# EAGLE board MINI_SAM_D51_006 (EAGLE 9.1.1)
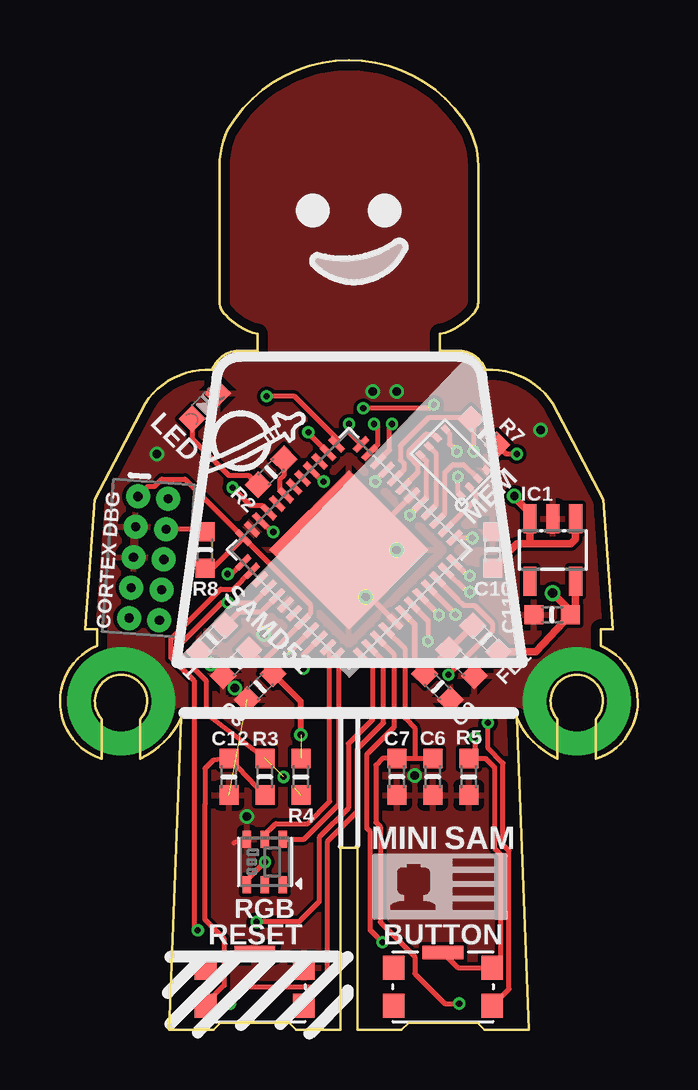
[diagram p0: board, top side]
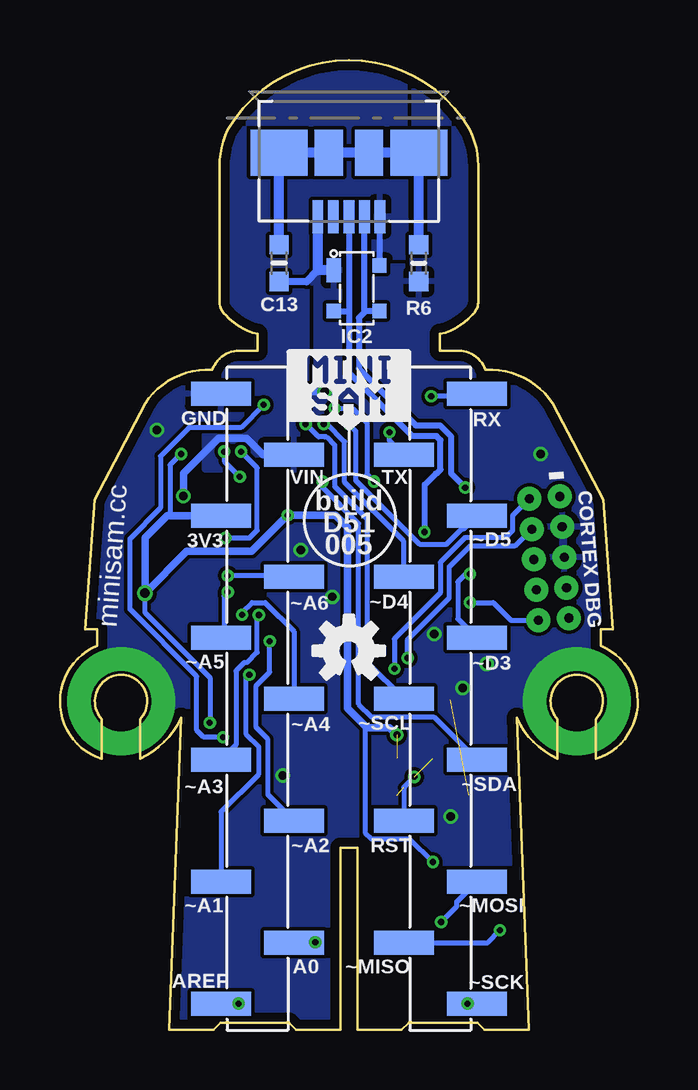
[diagram p1: board, bottom side, seen from below]

Size 24.1 x 40.42 mm. Coordinates in mm from the lower left corner, seen from the top.
Outline: 8.05,28.3 7.37,28.3 arc63 6.35,27.5 arc60 3.55,26.1 1.45,22.1 1.05,16.7 1.55,16.7 1.55,16 arc140 1.75,11.3 1.75,12.95 arc-132 2.55,14.8 arc-132 3.35,12.95 3.35,11.3 arc40 5.05,13 4.55,0 6.4,0 6.7,0.3 9.55,0.3 9.85,0 11.7,0 11.7,7.6 12.4,7.6 12.4,0 14.25,0 14.55,0.3 17.4,0.3 17.7,0 19.55,0 19.05,13 arc40 20.75,11.3 20.75,12.95 arc-132 21.55,14.8 arc-132 22.35,12.95 22.35,11.3 arc140 22.55,16 22.55,16.7 23.05,16.7 22.65,22.1 20.55,26.1 arc60 17.75,27.5 arc63 16.73,28.3 16.05,28.3 15.85,28.3 15.85,29 arc35 17.2,29.8 arc40 17.45,30.3 17.45,36 arc25 17.1,37.5 arc120 7,37.5 arc25 6.65,36 6.65,30.3 arc40 6.9,29.8 arc35 8.25,29 8.25,28.3 8.05,28.3
Copper layers (1*16): Top 0.035559375mm / dielectric 1.6mm / Bottom 0.035559375mm
Design rules "oshpark-2layer-tented": minimum track width 6mil, minimum drill 10mil, track to track 6mil, track to pad 6mil, pad to pad 6mil, via to via 6mil, smd to smd 6mil, copper to edge 15mil, drill to drill 6mil, minimum pad ring 5mil, minimum via ring 5mil, stop-mask expansion 2.5mil, vias tented up to drill 20mil, thermal gap 10mil

## Footprints (pad centres in the part's own frame; a part is rotated, then mirrored left to right if it is on the bottom)
_0603MP = smd 0.8 x 0.8: 1 -0.762,0; 2 0.762,0
SOT23-5 = smd 0.55 x 1.2: 1 -0.95,-1.3; 2 0,-1.3; 3 0.95,-1.3; 4 0.95,1.3; 5 -0.95,1.3
SOT143B_REFLOW = smd 1 x 0.6: P1 -0.75,-0.95 | smd 0.6 x 0.6: P2 0.95,-0.95; P$3 0.95,0.95; P$4 -0.95,0.95
TQFN48_7MM = smd 0.25 x 0.75: 1 -2.75,-3.475; 2 -2.25,-3.475; 3 -1.75,-3.475; 4 -1.25,-3.475; 5 -0.75,-3.475; 6 -0.25,-3.475; 7 0.25,-3.475; 8 0.75,-3.475; 9 1.25,-3.475; 10 1.75,-3.475; 11 2.25,-3.475; 12 2.75,-3.475; 25 2.75,3.475; 26 2.25,3.475; 27 1.75,3.475; 28 1.25,3.475; 29 0.75,3.475; 30 0.25,3.475; 31 -0.25,3.475; 32 -0.75,3.475; 33 -1.25,3.475; 34 -1.75,3.475; 35 -2.25,3.475; 36 -2.75,3.475 | smd 0.75 x 0.25: 13 3.475,-2.75; 14 3.475,-2.25; 15 3.475,-1.75; 16 3.475,-1.25; 17 3.475,-0.75; 18 3.475,-0.25; 19 3.475,0.25; 20 3.475,0.75; 21 3.475,1.25; 22 3.475,1.75; 23 3.475,2.25; 24 3.475,2.75; 37 -3.475,2.75; 38 -3.475,2.25; 39 -3.475,1.75; 40 -3.475,1.25; 41 -3.475,0.75; 42 -3.475,0.25; 43 -3.475,-0.25; 44 -3.475,-0.75; 45 -3.475,-1.25; 46 -3.475,-1.75; 47 -3.475,-2.25; 48 -3.475,-2.75 | smd 4.7 x 4.7: THERMAL 0,0
MOLEX_47346-1001 = smd 0.45 x 1.38: P1 1.3,-2.66; P2 0.65,-2.66; P3 0,-2.66; P4 -0.65,-2.66; P5 -1.3,-2.66 | smd 2.375 x 1.9: PAD1 -2.913,0; PAD4 2.913,0 | smd 1.175 x 1.9: PAD2 -0.838,0; PAD3 0.838,0
2X5-PTH-1.27MM = drill 0.381 pad 1: 1 -2.54,-0.635; 2 -2.54,0.635; 3 -1.27,-0.635; 4 -1.27,0.635; 5 0,-0.635; 6 0,0.635; 7 1.27,-0.635; 8 1.27,0.635; 9 2.54,-0.635; 10 2.54,0.635
1X11_SMT = smd 1 x 2.5: 1 -12.7,1.52; 2 -10.16,-1.52; 3 -7.62,1.52; 4 -5.08,-1.52; 5 -2.54,1.52; 6 0,-1.52; 7 2.54,1.52; 8 5.08,-1.52; 9 7.62,1.52; 10 10.16,-1.52; 11 12.7,1.52
CHIPLED_0603_NOOUTLINE = smd 0.8 x 0.8: A 0,-0.75; C 0,0.75
APA102_2020 = smd 0.7 x 0.35: 1 -0.95,-0.75; 2 -0.95,0; 3 -0.95,0.75; 4 0.95,0.75; 5 0.95,0; 6 0.95,-0.75
KMS_SWITCH = smd 0.9 x 1: 1 -2.05,-0.8; 2 -2.05,0.8; 4 2.05,0.8; 5 2.05,-0.8 | smd 1.7 x 0.55: 3 0,1.425
USON8 = smd 0.35 x 0.25: 1 -1.2,0.75; 2 -1.2,0.25; 3 -1.2,-0.25; 4 -1.2,-0.75; 5 1.2,-0.75; 6 1.2,-0.25; 7 1.2,0.25; 8 1.2,0.75

## Placement (x,y rotation side)
C1  0.1µF  [_0603MP]  6.35,16.3 225 top
C2  10µF  [_0603MP]  7.35,15.3 225 top
C3  0.1µF  [_0603MP]  8.35,14.3 225 top
C6  4.7µF  [_0603MP]  15.55,10.55 270 top
C7  0.1µF  [_0603MP]  14.05,10.55 270 top
C8  0.1µF  [_0603MP]  16.75,15.3 315 top
C9  10µF  [_0603MP]  15.75,14.3 315 top
C10  10µF  [_0603MP]  18.05,20 270 top
C11  10µF  [_0603MP]  20.52,17.3 180 top
C12  0.1µF  [_0603MP]  7.05,10.55 90 top
C13  4.7nF  [_0603MP]  14.96,31.95 270 bottom
FB1  [_0603MP]  17.75,16.3 135 top
IC1  AP2112K-3.3V  [SOT23-5]  20.55,20 180 top
IC2  PRTR5V0U2X  [SOT143B_REFLOW]  11.72,30.9 270 bottom
IC4  ATSAMD51G_TQFN48  [TQFN48_7MM]  12.05,20 45 top
J1  MOLEX_47346-100147346  [MOLEX_47346-1001]  12.05,36.55 0 bottom
J2  CORTEX_DEBUG_PTH  [2X5-PTH-1.27MM]  3.7,19.65 265.8 top
J3  [1X11_SMT]  15.86,13.8 90 bottom
J4  [1X11_SMT]  8.24,13.8 270 bottom
LED  [CHIPLED_0603_NOOUTLINE]  6.05,26 315 top
R2  1k  [_0603MP]  8.8,23.25 45 top
R3  330Ohm  [_0603MP]  8.55,10.55 270 top
R4  10K  [_0603MP]  10.05,10.55 90 top
R5  10K  [_0603MP]  17.05,10.55 90 top
R6  1M  [_0603MP]  9.14,31.95 90 bottom
R7  100k  [_0603MP]  17.68,24.91 135 top
R8  1k  [_0603MP]  6.05,20 270 top
RGB  AP102-2020  [APA102_2020]  8.55,7 90 top
SW1  KMS233GLFG  [KMS_SWITCH]  8.12,1.8 0 top
SW2  KMS233GLFG  [KMS_SWITCH]  15.97,1.8 0 top
U1  GD25x16  [USON8]  16.4,23.65 135 top
U$3  [OSHW-LOGO-S]  12.05,15.8 0 bottom

## Library data of the parts
C1-C3 C6-C13 FB1 IC4 LED R2-R8 RGB U1 = microbuilder
IC1 = SparkFun-PowerIC; PROD_ID: VREG-12457
IC2 J1 SW1 SW2 = Shockley_Custom
J2 = SparkFun-Connectors
J3 J4 = pinhead+
U$3 = SparkFun-Aesthetics

## Nets
!RESET: IC4.40 J2.10 J4.8 R3.1 R4.1
A0: IC4.3 J3.2
A1: IC4.10 J3.3
A2: IC4.7 J3.4
A3: IC4.8 J3.5
A4: IC4.9 J3.6
A5: IC4.11 J3.7
A6_D2: IC4.12 J3.8
AREF: C6.1 C7.1 IC4.4 J3.1
D3: IC4.37 J4.5
D4: IC4.23 J4.4
D5: IC4.24 J4.3
D9: IC4.28 R5.2 SW2.3 SW2.4
D10: IC4.29
D11: IC4.30
D12: IC4.32
D13: IC4.31 R2.2
DOTSTAR_CLK: IC4.47 RGB.5
DOTSTAR_DATA: IC4.48 RGB.6
GND: C1.2 C2.2 C3.2 C6.2 C7.2 C8.2 C9.2 C10.1 C11.2 C12.1 C13.2 IC1.2 IC2.P1 IC4.5 IC4.18 IC4.35 IC4.42 IC4.THERMAL J1.P5 J2.3 J2.5 J3.11 LED.C R5.1 R6.1 RGB.4 SW1.3 SW1.4 U1.4
MISO: IC4.38 J4.10
MOSI: IC4.1 J4.9
N$2: C13.1 J1.PAD1 J1.PAD2 J1.PAD3 J1.PAD4 R6.2
N$3: LED.A R2.1
N$4: C12.2 R3.2 SW1.1
N$9: C1.1 IC4.41
QSPI_CS: IC4.20 R7.2 U1.1
QSPI_DATA[0]: IC4.13 U1.5
QSPI_DATA[1]: IC4.14 U1.2
QSPI_DATA[2]: IC4.15 U1.3
QSPI_DATA[3]: IC4.16 U1.7
QSPI_SCK: IC4.19 U1.6
RX_D0: IC4.25 J4.1
SCK: IC4.2 J4.11
SCL: IC4.22 J4.6
SDA: IC4.21 J4.7
SWCLK: IC4.45 J2.4 R8.1
SWDIO: IC4.46 J2.2
TX_D1: IC4.26 J4.2
USBD+ [USB_DATA]: IC2.P2 IC4.34 J1.P3
USBD- [USB_DATA]: IC2.P$3 IC4.33 J1.P2
VDD: C2.1 C3.1 C11.1 FB1.1 IC1.5 IC4.17 IC4.36 IC4.44 J2.1 J3.9 R4.2 R7.1 R8.2 RGB.3 SW2.5 U1.8
VDDANA: C8.1 C9.1 FB1.2 IC4.6
VIN: C10.2 IC1.1 IC1.3 IC2.P$4 J1.P1 J3.10
VSW: IC4.43

## Tracks (layer width: path | path; a pad name or v marks a point on that pad's centre or on a via)
!RESET  (via drill 0.25)  (2 unrouted)
  Top 0.203: IC4.40 8.09,17.81 v7,17.81 6.75,17.81 4.99,16.05 4.99,15.66 6.1,14.54 6.1,13.17 R3.1
  Bottom 0.203: v7,17.81 6.03,17.81 5.29,17.07 J2.10 | v9.32,10.54 9.76,10.11 J4.8
A0  (via drill 0.25)
  Top 0.203: IC4.3 13.95,15.62 13.95,12.63 12.8,11.48 12.8,8.4 12.95,8.25 12.95,4.15 v13.45,3.65
  Bottom 0.203: v13.45,3.65 J3.2
A1  (via drill 0.25)
  Top 0.203: v16.2,14.8 18.03,16.63 18.03,16.94 17.28,17.69 16.83,17.69 16.58,17.95 16.57,17.95 IC4.10
  Bottom 0.203: J3.3 17.38,9.09 15.8,10.66 15.8,11.8 16.35,12.35 16.35,14.65 v16.2,14.8
A2  (via drill 0.25)
  Top 0.203: IC4.7 15.35,17.05 v15.35,16.2
  Bottom 0.203: v15.35,16.2 15.35,14.91 15.92,14.35 15.92,12.61 15.42,12.11 15.42,9.8 J3.4
A3  (via drill 0.25)
  Top 0.203: v15.81,17.29 IC4.8
  Bottom 0.203: J3.5 16.75,11.88 16.75,14.96 16.41,15.31 16.3,15.31 15.87,15.73 15.87,17.22 15.85,17.25 v15.81,17.29
A4  (via drill 0.25)
  Top 0.203: IC4.9 16.5,17.32 v16.5,17.3
  Bottom 0.203: J3.6 14.34,16.61 15.54,17.81 16.09,17.81 16.5,17.4 v16.5,17.3
A5  (via drill 0.25)
  Top 0.203: IC4.11 16.98,18.25 v17.1,18.25
  Bottom 0.203: J3.7 17.25,16.46 17.25,18.09 v17.1,18.25
A6_D2  (via drill 0.25)
  Top 0.203: IC4.12 17.01,18.93 v17.1,18.93
  Bottom 0.203: v17.1,18.93 14.39,18.93 J3.8
AREF  (via drill 0.25)
  Top 0.203: IC4.4 14.38,15.9 14.38,13 14.8,12.58 14.8,11.31 | v16.65,1.1 16.05,1.1 14.8,2.35 14.8,3.04 13.35,4.49 13.35,8.46 13.17,8.65 13.17,11.03 13.45,11.31 C7.1 14.55,11.31 14.6,11.31 14.8,11.31 | 14.8,11.31 C6.1
  Bottom 0.203: J3.1 v16.65,1.1
D3  (via drill 0.25)
  Top 0.203: v7,19 7.16,19 IC4.37
  Bottom 0.203: J4.5 7.51,17.13 7.51,18.67 7.18,19 v7,19
D4  (via drill 0.25)
  Top 0.203: IC4.23 13.25,24.38 13.25,25.13 13.13,25.25 v13.09,25.25
  Bottom 0.203: J4.4 9.76,20.36 12.22,22.82 12.23,22.83 12.23,24.51 12.97,25.25 v13.09,25.25
D5  (via drill 0.25)
  Top 0.203: IC4.24 12.05,24.91 v12.05,25.25
  Bottom 0.203: J4.3 7.25,20.88 7.34,20.88 7.98,20.24 9.11,20.24 11.75,22.89 11.75,24.96 v12.05,25.25
D9  (via drill 0.25)
  Top 0.203: IC4.28 10.97,22.85 v11,22.85 | v15.6,26.05 15.45,25.9 v12.65,25.9 | SW2.3 16.6,2.6 SW2.4 18.37,2.95 18.37,7.32 18.12,7.57 18.12,10.94 17.75,11.31 R5.2 17.3,11.56 v17.3,12.2
  Bottom 0.203: v11,22.85 11.3,23.15 11.3,25.3 11.9,25.9 v12.65,25.9 | v17.3,12.2 18.1,12.2 18.39,12.5 18.39,14.74 21.18,17.52 21.18,20.48 19.91,21.75 19.91,23.91 18.72,25.1 16.55,25.1 v15.6,26.05
D13
  Top 0.203: R2.2 9.34,23.09 9.16,22.92 9.16,22.53 IC4.31
DOTSTAR_CLK
  Top 0.203: IC4.47 11.25,15.89 11.25,9.51 10.33,8.6 9,8.6 8.72,8.32 8.55,8.13 RGB.5
DOTSTAR_DATA
  Top 0.203: RGB.6 10.19,7.95 11.63,9.4 11.63,15.5 IC4.48
GND  (via drill 0.35, 2.5 pad 4.5)  (1 unrouted)
  Top 0.203: IC4.5 12.4,18.59 12.4,20 | IC4.18 12.4,20 | 12.4,20 IC4.THERMAL v14.05,20 | RGB.4 7.26,7.79
  Bottom 0.305: C13.2 13.81,31.18 13.35,31.65 | v14.05,26.6 v13.05,26.6
  Bottom 0.406: J1.P5 13.35,31.65 IC2.P1
  other vias: 2.55,13.7 21.55,13.7 6.3,15.25 7.8,8.9 20.05,25 4.05,24 7.3,14.25 12.75,18.05 8.5,16.5 14.8,10.6
  pour Top: 4.55,0 19.55,0 19.55,12 21.05,12 21.05,14 22.05,14 22.05,12 24.05,12 24.05,42 0.05,42 0.05,12 2.05,12 2.05,14 3.05,14 3.05,12 4.55,12
  pour Bottom (rank 2): 9.75,42 9.75,32 13.55,32 13.55,27.35 24.05,27.35 24.05,12 19.55,12 19.55,0 4.55,0 4.55,12 3.05,12 3.05,14 2.05,14 2.05,12 0.05,12 0.05,42
MISO  (via drill 0.25)
  Top 0.203: IC4.38 7.23,18.37 6.7,18.37 4.69,16.36 | v5.75,4.15 5.6,4.3 5.6,14.54 4.63,15.51 4.63,16.3 | 4.63,16.3 4.69,16.36 | 4.63,16.3 4.69,16.36
  Bottom 0.203: J4.10 6.26,3.64 v5.75,4.15
MOSI  (via drill 0.25)
  Top 0.203: IC4.1 13.05,15.11 13.05,12.95 12.03,11.93 12.03,9.24 10.81,8.03 10.81,5.35 9.96,4.5 v8.2,4.5
  Bottom 0.203: J4.9 7.55,5.35 7.55,5.15 v8.2,4.5
N$2
  Bottom 0.406: R6.2 J1.PAD4 J1.PAD3 J1.PAD2 J1.PAD1 C13.1
N$3
  Top 0.203: LED.A 5.52,24.63 7.04,23.11 7.86,23.11 R2.1
N$4
  Top 0.203: SW1.1 6.07,1.08 6.85,1.85 6.85,3.79 6.05,4.6 6.05,9.4 6.05,10.9 6.38,11.23 C12.2 8.55,9.73 R3.2
N$9
  Top 0.203: IC4.41 8.39,17.4 7.45,17.4 C1.1
QSPI_CS  (via drill 0.25)
  Top 0.203: R7.2 17.1,25.5 15.36,25.5 14.2,24.33 14.2,23.75 14.35,23.6 14.35,23.35 IC4.20 | R7.2 | v17.25,24.1 17.24,25.35 R7.2 | U1.1 16.6,22.39 v16.6,23.05
  Bottom 0.203: v17.25,24.1 17.25,23.7 v16.6,23.05
QSPI_DATA[0]  (via drill 0.25)
  Top 0.203: U1.5 16.08,25.02 16.23,24.87 16.23,24.42 v16.55,24.1 | IC4.13 16.46,20.5 v17.2,20.5
  Bottom 0.203: v17.2,20.5 16.19,20.5 15.87,20.82 15.87,23.43 v16.55,24.1
QSPI_DATA[1]
  Top 0.203: U1.2 17.35,22.35 17.35,22.12 IC4.14
QSPI_DATA[2]
  Top 0.203: IC4.15 16.05,21.53 16.05,23.22 16.39,23.56 16.84,23.56 U1.3
QSPI_DATA[3]
  Top 0.203: IC4.16 15.69,21.88 15.69,24 U1.7
QSPI_SCK
  Top 0.203: IC4.19 14.93,23.24 14.93,23.52 14.55,23.9 14.55,24.11 15.27,24.83 15.57,24.83 U1.6
RX_D0  (via drill 0.25)
  Top 0.203: IC4.25 11.53,24.65 9.79,26.4 v8.62,26.4
  Bottom 0.203: v8.62,26.4 6.82,26.4 J4.1
SCK  (via drill 0.25)
  Top 0.203: IC4.2 13.5,15.37 13.5,12.8 12.41,11.71 12.41,9.11 11.16,7.87 11.16,2.17 10.8,1.8 7.8,1.8 v7.1,1.1
  Bottom 0.203: J4.11 v7.1,1.1
SCL  (via drill 0.25)
  Top 0.203: IC4.22 13.75,24.18 13.75,25.15 v13.85,25.25
  Bottom 0.203: 12.98,24.71 13.05,24.71 | J4.6 11.29,15.33 11.29,21.3 12.64,22.65 12.64,24.37 12.98,24.71 | 13.05,24.71 12.98,24.71 | 13.05,24.71 13.31,24.71 v13.85,25.25
SDA  (via drill 0.25)
  Top 0.203: v13.15,22.85 13.15,22.87 IC4.21
  Bottom 0.203: v13.15,22.85 13.15,22.6 11.64,21.1 11.64,13.57 11.11,13.05 8.5,13.05 J4.7
SWCLK  (via drill 0.25)
  Top 0.203: IC4.45 9.6,15.78 v9.6,15.5 | R8.1 5.94,20.87 J2.4
  Bottom 0.203: v9.6,15.5 9.6,16.27 7.86,18.01 7.86,19.3 7.01,20.16 5.14,20.16 J2.4
SWDIO  (via drill 0.25)
  Top 0.203: IC4.46 10.15,15.62 v10.15,15.05
  Bottom 0.203: 5.5,20.53 7.19,20.53 8.24,19.48 8.24,18.21 10.15,16.3 v10.15,15.05 | J2.2 5.21,21.44 5.21,20.82 5.5,20.53 | 5.5,20.53
TX_D1  (via drill 0.25)
  Top 0.203: IC4.26 10.36,24.87 v10.36,24.91
  Bottom 0.203: J4.2 10.36,24.56 v10.36,24.91
USBD+  (via drill 0.25)
  Top 0.254: IC4.34 8.82,20.75 v8.9,20.75
  Bottom 0.254: J1.P3 12.05,30 | IC2.P2 12.1,29.95 12.05,30 | v8.9,20.75 8.88,20.77 8.88,22.72 8.42,23.18 8.39,23.18 8.23,23.34 8.23,24.58 8.39,24.74 9.4,24.74 12.05,27.39 12.05,30
USBD-  (via drill 0.25)
  Top 0.203: IC4.33 8.43,21.85 7.95,21.85 v7.2,22.6
  Bottom 0.254: J1.P2 11.4,30 11.35,29.95 | IC2.P$3 11.35,29.95 | 11.35,29.95 11.63,29.67 11.63,27.56 9.26,25.19 8.24,25.19 7.78,24.73 7.78,23.18 v7.2,22.6
VDD  (via drill 0.25, 0.3, 0.4)  (1 unrouted)
  Top 0.203: IC4.36 10.45,17.71 10.45,17.35 10.12,17.02 IC4.44 8.46,15.35 | R8.2 6.33,19.19 IC4.36 | v19.05,24 18.6,24 R7.1 | IC4.17 15.29,22.18 15.29,23.7 U1.8 | SW2.5 18.73,1.7 18.73,7.47 18.48,7.72 18.48,11.12 17.85,11.75 v17.85,12.8 | J2.1 3.67,22.65 3.95,22.65 4.25,22.95 5.21,22.95 IC4.36 | v8.55,7 7.8,6.25 RGB.3
  Top 0.254: IC4.17 14.6,21.49 v14.6,21.45 | 8.4,15.35 8.38,15.35 C2.1 | 8.4,15.35 8.4,15.33 C3.1 10.05,13.68 v10.05,12.3 | 8.4,15.35 8.46,15.35
  Top 0.305: FB1.1 19.84,15.76 C11.1 | IC1.5 21.5,17.42 C11.1 | v20.55,18.2 21.28,17.47 C11.1
  Bottom 0.203: v20.55,18.2 20.55,17.39 17.84,14.68 v17.84,12.81 v17.85,12.8 | 19.63,21.42 19.5,21.54 19.5,23.54 v19.05,24 | v8.55,7 9.51,7.97 11.11,7.97 11.37,8.23 11.37,12.68
  Bottom 0.305: J3.9 19.63,21.42 20.55,20.5 v20.55,18.2 18.81,19.94 16.11,19.94 v14.6,21.45 12.6,21.45 12.1,20.95 12.1,13.4 11.37,12.68 11.3,12.6 10.35,12.6 v10.05,12.3
VDDANA
  Top 0.254: FB1.2 C8.1 C9.1 14.8,15.25 14.8,16.9 14.79,16.9 IC4.6
VIN  (via drill 0.35)
  Top 0.305: IC1.1 21.5,20.45 21.3,20.25 19.6,20.25 | C10.2 19.06,20.25 19.6,20.25 | 19.6,20.25 IC1.3 19.6,21.55 18.95,22.2 v18.95,22.25
  Bottom 0.254: J1.P1 10.77,33.87 IC2.P$4
  Bottom 0.305: J3.10 15.62,23.96 16.32,24.66 17.48,24.66 18.95,23.19 v18.95,22.25
  pour Bottom: 9.76,42 9.7,32.2 13.8,32.2 13.85,23.35 18.05,23.35 18.05,42

## Text on the board
tPlace: CORTEX DBG
bPlace: - | CORTEX DBG
tNames: MEM | R2 | SAMD51 | MINI | SAM | RESET | BUTTON
bNames: RX | GND | TX | VIN | ~D5 | build / D51 / 005 | 3V3 | minisam.cc | ~D4 | ~A6 | ~D3 | ~A5 | ~SCL | ~A4 | ~SDA | ~A3 | RST | ~A2 | ~MOSI | ~A1 | ~SCK | ~MISO | A0 | AREF
tStop: -
_tNames: L | L | RGB | RGB | IC1 | IC1 | C1 | C1 | FB1 | FB1 | C10 | C11 | C2 | C2 | C3 | C3 | C8 | C8 | C9 | C9 | C6 | C6 | R5 | R5 | C7 | C7 | R3 | R3 | R4 | R4 | C12 | C12
_bNames: IC2 | IC2 | R6 | R6 | C13 | C13 | JP1 | JP1